# EAGLE board tulip breakout (EAGLE 9.6.2)
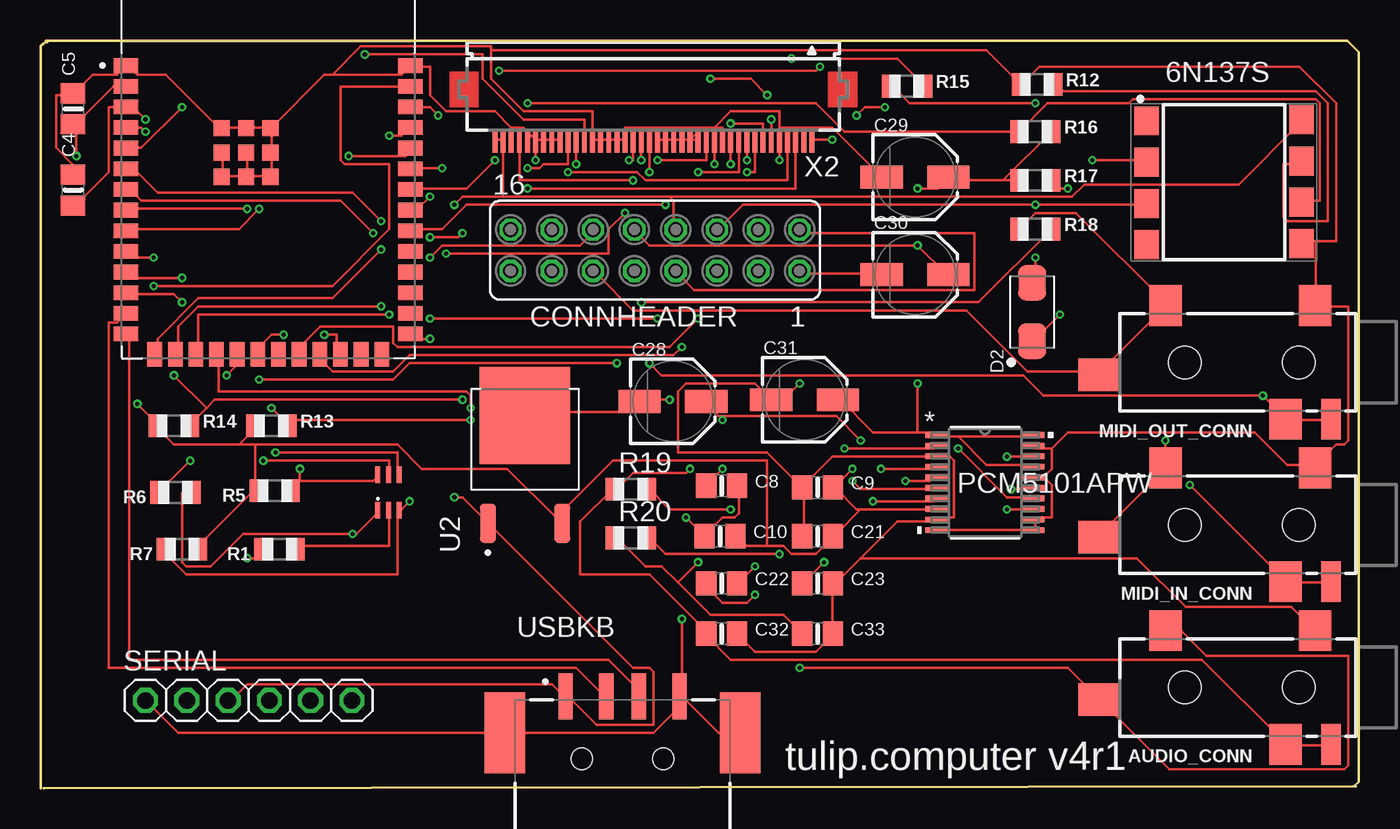
[diagram p0: board, top side]
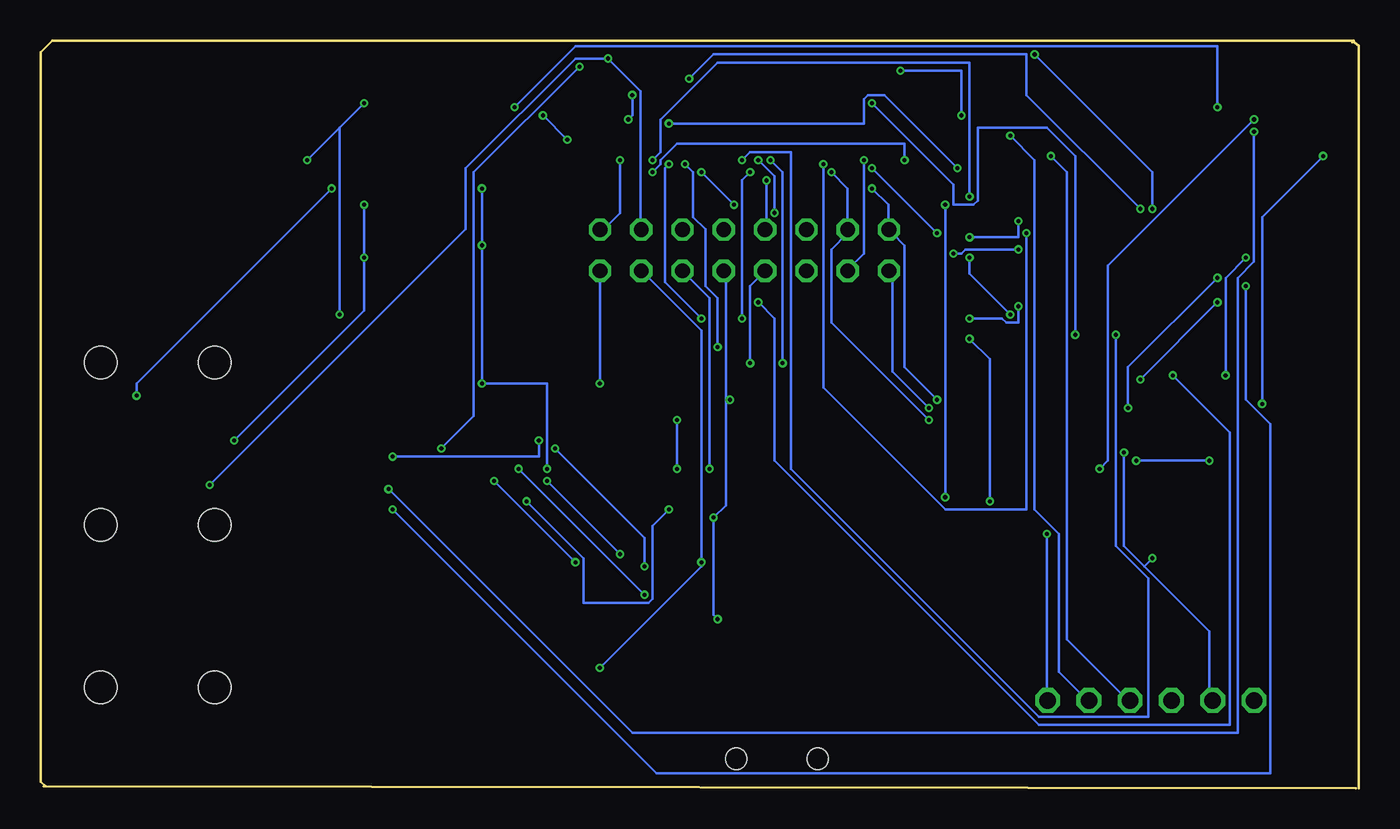
[diagram p1: board, bottom side, seen from below]

Size 81.1 x 46 mm. Coordinates in mm from the lower left corner, seen from the top.
Outline: 0.3,46 80.4,46 81.1,45.3 81.1,0.4 80.8,0.1
Outline: 0,0 0,45.7 0.4,46 0.4,45.9
Outline: 0.2,0 80.9,0.1
Copper layers (1*16): Top 0.035559375mm / dielectric 1.6mm / Bottom 0.035559375mm
Design rules "oshpark-2layer *": minimum track width 6mil, minimum drill 10mil, track to track 6mil, track to pad 6mil, pad to pad 6mil, via to via 6mil, smd to smd 6mil, copper to edge 0mil, drill to drill 6mil, minimum pad ring 5mil, minimum via ring 5mil, stop-mask expansion 2.5mil, vias tented up to drill 0mil, thermal gap 10mil

## Footprints (pad centres in the part's own frame; a part is rotated, then mirrored left to right if it is on the bottom)
8-SMD = smd 1.52 x 1.78: 1 -4.96,3.96; 2 -4.96,1.42; 3 -4.96,-1.12; 4 -4.96,-3.66; 5 4.58,-3.59; 6 4.58,-1.05; 7 4.58,1.49; 8 4.58,4.03
4UCONN_19269 = smd 2 x 2.5: 1 2.5,-3.5; 2 11.7,-3.5; 3 4.3,3.5 | smd 2.5 x 2: 4 15.8,0.75 | smd 1.2 x 2.5: 5 1.5,3.5 | hole 2: 3.5,0; 10.5,0
0805-NO = smd 1.24 x 1.5: 1 -0.95,0; 2 0.95,0
PANASONIC_C = smd 2.6 x 1.4: + 2.05,0; - -2.05,0
FE08-2 = drill 0.914 octagon: 1 -8.89,1.27; 2 -8.89,-1.27; 3 -6.35,1.27; 4 -6.35,-1.27; 5 -3.81,1.27; 6 -3.81,-1.27; 7 -1.27,1.27; 8 -1.27,-1.27; 9 1.27,1.27; 10 1.27,-1.27; 11 3.81,1.27; 12 3.81,-1.27; 13 6.35,1.27; 14 6.35,-1.27; 15 8.89,1.27; 16 8.89,-1.27
DIOM449X264X300L114X135N = smd 2.17 x 1.69: A 1.795,0; C -1.795,0
R0805 = smd 1.1 x 1.4: 1 -1,0; 2 1,0
SOT236 = smd 0.3 x 1: 1 -0.66,-1.09; 2 0,-1.09; 3 0.66,-1.09; 4 0.66,1.09; 5 0,1.09; 6 -0.66,1.09
1X06 = drill 1.016 octagon: 1 -6.35,0; 2 -3.81,0; 3 -1.27,0; 4 1.27,0; 5 3.81,0; 6 6.35,0
XCVR_ESP32-S3-WROOM-2-N32R8V = smd 1.5 x 0.9: 1 -8.75,5.26; 2 -8.75,3.99; 3 -8.75,2.72; 4 -8.75,1.45; 5 -8.75,0.18; 6 -8.75,-1.09; 7 -8.75,-2.36; 8 -8.75,-3.63; 9 -8.75,-4.9; 10 -8.75,-6.17; 11 -8.75,-7.44; 12 -8.75,-8.71; 13 -8.75,-9.98; 14 -8.75,-11.25; 27 8.75,-11.25; 28 8.75,-9.98; 29 8.75,-8.71; 30 8.75,-7.44; 31 8.75,-6.17; 32 8.75,-4.9; 33 8.75,-3.63; 34 8.75,-2.36; 35 8.75,-1.09; 36 8.75,0.18; 37 8.75,1.45; 38 8.75,2.72; 39 8.75,3.99; 40 8.75,5.26 | smd 0.9 x 1.5: 15 -6.985,-12.5; 16 -5.715,-12.5; 17 -4.445,-12.5; 18 -3.175,-12.5; 19 -1.905,-12.5; 20 -0.635,-12.5; 21 0.635,-12.5; 22 1.905,-12.5; 23 3.175,-12.5; 24 4.445,-12.5; 25 5.715,-12.5; 26 6.985,-12.5 | smd 1 x 1: 41_1 -1.36,-0.09; 41_2 -2.86,-0.09; 41_3 0.14,-0.09; 41_4 -2.86,-1.59; 41_5 -1.36,-1.59; 41_6 0.14,-1.59; 41_7 -2.86,1.41; 41_8 -1.36,1.41; 41_9 0.14,1.41
DPAK456P972X240-3N = smd 2.4 x 0.98: 1 -4.2,2.28; 2 -4.2,-2.28 | smd 5.96 x 5.57: 3 2.42,0
PW20_TEX = smd 1.473 x 0.356: 1 -2.921,2.925; 2 -2.921,2.275; 3 -2.921,1.625; 4 -2.921,0.975; 5 -2.921,0.325; 6 -2.921,-0.325; 7 -2.921,-0.975; 8 -2.921,-1.625; 9 -2.921,-2.275; 10 -2.921,-2.925; 11 2.921,-2.925; 12 2.921,-2.275; 13 2.921,-1.625; 14 2.921,-0.975; 15 2.921,-0.325; 16 2.921,0.325; 17 2.921,0.975; 18 2.921,1.625; 19 2.921,2.275; 20 2.921,2.925
SAMTEC_USB-A-S-X-X-SM2 = smd 0.9 x 2.8: 01 -3.5,3.85; 02 -1,3.85; 03 1,3.85; 04 3.5,3.85 | smd 2.5 x 5: S1 -7.25,1.6; S2 7.25,1.6 | hole 1.3: -2.5,0; 2.5,0
FH12-40S-0.5SH = smd 0.3 x 1.3: 1 -9.75,3.25; 2 -9.25,3.25; 3 -8.75,3.25; 4 -8.25,3.25; 5 -7.75,3.25; 6 -7.25,3.25; 7 -6.75,3.25; 8 -6.25,3.25; 9 -5.75,3.25; 10 -5.25,3.25; 11 -4.75,3.25; 12 -4.25,3.25; 13 -3.75,3.25; 14 -3.25,3.25; 15 -2.75,3.25; 16 -2.25,3.25; 17 -1.75,3.25; 18 -1.25,3.25; 19 -0.75,3.25; 20 -0.25,3.25; 21 0.25,3.25; 22 0.75,3.25; 23 1.25,3.25; 24 1.75,3.25; 25 2.25,3.25; 26 2.75,3.25; 27 3.25,3.25; 28 3.75,3.25; 29 4.25,3.25; 30 4.75,3.25; 31 5.25,3.25; 32 5.75,3.25; 33 6.25,3.25; 34 6.75,3.25; 35 7.25,3.25; 36 7.75,3.25; 37 8.25,3.25; 38 8.75,3.25; 39 9.25,3.25; 40 9.75,3.25

## Placement (x,y rotation side)
6N137S  6N137S  [8-SMD]  73,37.1 0 top
AUDIO_CONN  19269  [4UCONN_19269]  80.9,6.2 180 top
C4  4.7uF  [0805-NO]  2,36.8 90 top
C5  4.7uF  [0805-NO]  2,41.8 90 top
C8  0.1uF  [0805-NO]  41.9,18.6 0 top
C9  0.1uF  [0805-NO]  47.8,18.5 0 top
C10  0.1uF  [0805-NO]  41.8,15.5 0 top
C21  0.1uF  [0805-NO]  47.8,15.5 0 top
C22  2.2uF  [0805-NO]  41.9,12.6 0 top
C23  2.2uF  [0805-NO]  47.8,12.6 0 top
C28  10uF  [PANASONIC_C]  38.9,23.8 0 top
C29  10uF  [PANASONIC_C]  53.8,37.6 0 top
C30  10uF  [PANASONIC_C]  53.8,31.6 0 top
C31  10uF  [PANASONIC_C]  47,23.9 0 top
C32  2.2nF  [0805-NO]  41.9,9.5 0 top
C33  2.2nF  [0805-NO]  47.8,9.5 0 top
CONNHEADER  [FE08-2]  37.8,33.1 180 top
D2  EGF1A  [DIOM449X264X300L114X135N]  61,29.3 90 top
MIDI_IN_CONN  19269  [4UCONN_19269]  80.9,16.2 180 top
MIDI_OUT_CONN  19269  [4UCONN_19269]  80.9,26.2 180 top
R1  100k  [R0805]  14.7,14.7 180 top
R5  10k  [R0805]  14.4,18.3 180 top
R6  100k  [R0805]  8.3,18.2 180 top
R7  10k  [R0805]  8.7,14.7 180 top
R12  4.7K  [R0805]  61.3,43.3 0 top
R13  4.7K  [R0805]  14.2,22.3 0 top
R14  4.7K  [R0805]  8.2,22.3 0 top
R15  220  [R0805]  53.3,43.2 0 top
R16  470  [R0805]  61.2,40.4 0 top
R17  33  [R0805]  61.2,37.4 0 top
R18  10  [R0805]  61.2,34.4 0 top
R19  470  [R0805]  36.3,18.4 0 top
R20  470  [R0805]  36.3,15.4 0 top
RESET  MBT3904DW1T1G  [SOT236]  21.4,18.2 0 top
SERIAL  [1X06]  12.8,5.4 0 top
U1  ESP32-S3-WROOM-2-N32R8V  [XCVR_ESP32-S3-WROOM-2-N32R8V]  14,39.2 0 top
U2  LD29150DT33R  [DPAK456P972X240-3N]  29.8,20.5 90 top
U3  PCM5101APW  [PW20_TEX]  58.1,18.8 0 top
USBKB  USB-A-S-X-X-SM2  [SAMTEC_USB-A-S-X-X-SM2]  35.8,1.8 0 top
X2  FH12-40S-0.5SH  [FH12-40S-0.5SH]  37.7,43 180 top

## Library data of the parts
6N137S = 6N137S; AVAILABILITY: In Stock; DESCRIPTION: Logic Output Optoisolator 15MBd Open Collector 5000Vrms 1 Channel 10kV/µs CMTI 8-SMD; MF: Lite-On Inc.; MP: 6N137S; PACKAGE: SMD-8 Lite-On Inc.; PRICE: None; PURCHASE-URL: https://pricing.snapeda.com/search/part/6N137S/?ref=eda
AUDIO_CONN C4 C5 C8-C10 C21-C23 C28-C33 MIDI_IN_CONN MIDI_OUT_CONN = microbuilder
CONNHEADER = con-lsta; OC_FARNELL: unknown; OC_NEWARK: unknown
D2 = EGF1A; AVAILABILITY: In Stock; DESCRIPTION: Diode Standard 50 V 1A Surface Mount DO-214AC (SMA); MF: ON Semiconductor; MP: EGF1A; PACKAGE: SMA-2 ON Semiconductor; PRICE: None; PURCHASE-URL: https://pricing.snapeda.com/search/part/EGF1A/?ref=eda
R1 R5-R7 R12-R20 SERIAL = adafruit
RESET = MBT3904DW1T1G; AVAILABILITY: In Stock; DESCRIPTION: Bipolar (BJT) Transistor Array 2 NPN (Dual) 40V 200mA 300MHz 150mW Surface Mount SC-88/SC70-6/SOT-363; MF: ON Semiconductor; MP: MBT3904DW1T1G; PACKAGE: SC-88-6 ON Semiconductor; PRICE: None; PURCHASE-URL: https://pricing.snapeda.com/search/part/MBT3904DW1T1G/?ref=eda
U1 = ESP32-S3-WROOM-2-N32R8V; AVAILABILITY: In Stock; DESCRIPTION: Bluetooth, WiFi 802.11b/g/n, Bluetooth v5.0 Transceiver Module 2.4GHz PCB Trace Surface Mount; MF: Espressif Systems; MP: ESP32-S3-WROOM-2-N32R8V; PACKAGE: Package; PRICE: None; PURCHASE-URL: https://pricing.snapeda.com/search/part/ESP32-S3-WROOM-2-N32R8V/?ref=eda
U2 = LD29150DT33R; DESCRIPTION: Linear Voltage Regulator IC Positive Fixed 1 Output 1.5A DPAK; DIGI-KEY_PART_NUMBER: 497-1496-2-ND; MF: STMicroelectronics; MP: LD29150DT33R; PACKAGE: TO-252 STMicroelectronics; PURCHASE-URL: https://pricing.snapeda.com/search/part/LD29150DT33R/?ref=eda
U3 = pcm5101apw; COPYRIGHT: Copyright (C) 2022 Ultra Librarian. All rights reserved.; DIGI-KEY_PART_NUMBER_1: PCM5101APW-ND; MANUFACTURER_PART_NUMBER: PCM5101APW; MFR_NAME: Texas Instruments
USBKB = USB-A-S-X-X-SM2; AVAILABILITY: In Stock; DESCRIPTION: USB-A (USB TYPE-A) USB 2.0 Receptacle Connector 4 Position Surface Mount, Right Angle; MF: Samtec; MP: USB-A-S-F-W-SM2-TR; PACKAGE: None; PRICE: None; PURCHASE-URL: https://pricing.snapeda.com/search/part/USB-A-S-F-W-SM2-TR/?ref=eda
X2 = con-hirose; MPN: FH12-40S-0.5SH(55); OC_FARNELL: 1324556; OC_NEWARK: 34M6178

## Nets
3V3: C5.1 C9.2 C10.2 C21.2 C29.+ C30.+ C31.+ CONNHEADER.10 R5.2 R7.1 R13.1 R14.1 R16.2 R17.1 U1.2 U2.2 U3.1 U3.8 U3.17 U3.20 X2.37
5V_USB: 6N137S.8 CONNHEADER.8 SERIAL.3 U2.1 USBKB.01 X2.39 X2.40
!DTR: R1.2 RESET.4 SERIAL.2
!RTS: R6.1 RESET.1 SERIAL.6
AGND: AUDIO_CONN.1 C9.1 C21.1 C23.2 C30.- C31.- C32.2 C33.2 CONNHEADER.1 U3.3 U3.9
B6: U1.20 X2.14
B7: U1.23 X2.13
BCLK: U1.39 U3.13
BLEN: U1.32 X2.10
D+: U1.14 USBKB.03
D-: U1.13 USBKB.02
DE: U1.35 X2.7
DIN: U1.38 U3.14
ESP32_EN: C4.1 R5.1 RESET.6 U1.3
G5: U1.12 X2.23
G6: U1.15 X2.22
G7: U1.16 X2.21
GND: 6N137S.5 C4.2 C5.2 C8.2 C10.1 C28.- C29.- CONNHEADER.2 CONNHEADER.7 CONNHEADER.13 MIDI_IN_CONN.1 MIDI_OUT_CONN.1 R12.1 SERIAL.1 U1.1 U1.40 U1.41_1 U1.41_2 U1.41_3 U1.41_4 U1.41_5 U1.41_6 U1.41_7 U1.41_8 U1.41_9 U2.3 U3.10 U3.11 U3.12 U3.16 U3.19 USBKB.04 USBKB.S1 USBKB.S2 X2.5 X2.12 X2.15 X2.16 X2.17 X2.18 X2.19 X2.20 X2.24 X2.25 X2.26 X2.27 X2.28 X2.32 X2.33 X2.34 X2.35 X2.36 X2.38
GPIO10: CONNHEADER.15 U1.18
HSYNC: U1.33 X2.9
INT: U1.5 X2.1
IO0: R7.2 RESET.3 U1.27
LOUT: AUDIO_CONN.2 AUDIO_CONN.4 C33.1 CONNHEADER.3 R20.1
LRC: U1.4 U3.15
MIDI_IN: 6N137S.6 R16.1 U1.24
MIDI_IN_SINK: 6N137S.3 CONNHEADER.6 D2.A MIDI_IN_CONN.2 MIDI_IN_CONN.4
MIDI_IN_SOURCE: CONNHEADER.4 MIDI_IN_CONN.3 MIDI_IN_CONN.5 R15.2
MIDI_OUT: R18.2 U1.19
MIDI_OUT_SINK: CONNHEADER.11 MIDI_OUT_CONN.2 MIDI_OUT_CONN.4 R18.1
MIDI_OUT_SOURCE: CONNHEADER.9 MIDI_OUT_CONN.3 MIDI_OUT_CONN.5 R17.2
N$1: R1.1 RESET.2
N$2: R6.2 RESET.5
N$7: C8.1 C28.+ U3.18
N$8: R19.2 U3.7
N$16: C22.1 U3.4
N$18: C22.2 U3.2
N$30: 6N137S.2 D2.C R15.1
N$32: 6N137S.7 R12.2
OUTL: R20.2 U3.6
PCLK: U1.22 X2.11
PWM: U1.9 X2.6
PWR: CONNHEADER.12 U1.17
R5: U1.6 X2.31
R6: U1.7 X2.30
R7: U1.8 X2.29
ROUT: AUDIO_CONN.3 AUDIO_CONN.5 C32.1 CONNHEADER.5 R19.1
SCL: CONNHEADER.16 R14.2 U1.10 X2.3
SDA: CONNHEADER.14 R13.2 U1.11 X2.4
UART0_RXD: SERIAL.4 U1.36
UART0_TXD: SERIAL.5 U1.37
VNEG: C23.1 U3.5
VSYNC: U1.34 X2.8

## Tracks (layer width: path | path; a pad name or v marks a point on that pad's centre or on a via)
3V3  (via drill 0.25)
  Top 0.152: 56.45,21.65 58.2,19.9 60.95,19.9 U3.17 | 56.45,21.65 55.2,21.65 U3.1 54.95,21.9 53.95,21.9 | 56.45,21.65 60.95,21.65 U3.20 | 53.95,21.9 51.2,21.9 49.2,23.9 C31.+ | 59.2,37.4 55.95,37.4 C29.+ 55.7,37.4 55.2,36.9 v53.95,36.9 | 59.2,37.4 R17.1 | 59.2,37.4 R16.2 | X2.37 29.45,37.4 v36.45,37.4 | C30.+ 55.7,31.65 v53.95,33.4 37.45,33.4 36.7,34.15 CONNHEADER.10 | v53.95,24.9 53.95,21.9 | 44.7,14.9 45.7,14.9 46.2,14.4 47.7,14.4 48.7,15.4 C21.2 48.95,15.65 50.45,17.15 | 44.7,14.9 43.45,14.9 42.95,15.4 C10.2 | 50.45,17.15 50.2,17.15 48.95,18.4 C9.2 48.95,18.65 v49.95,19.65 | 50.45,17.15 54.95,17.15 U3.8 | R7.1 9.7,14.9 12.95,18.15 13.2,18.15 R5.2 13.2,18.4 13.2,21.15 | U1.2 5.2,43.15 4.45,43.15 2.2,40.9 C5.1 2.2,40.65 v2.2,38.9 | 12.2,21.15 8.2,21.15 7.2,22.15 R14.1 7.2,22.4 v5.95,23.65 | 12.2,21.15 13.2,22.15 R13.1 | 31.7,16.65 28.7,19.65 23.45,19.65 21.95,21.15 13.2,21.15 | 31.7,16.65 31.95,16.4 U2.2 31.7,16.65 | 12.2,21.15 13.2,21.15 | 44.7,14.9 44.7,20.15 35.2,20.15 31.7,16.65
  Bottom 0.152: v36.45,37.4 36.45,34.4 CONNHEADER.10 | v53.95,36.9 v53.95,33.4 v53.95,24.9 49.95,24.9 v49.95,19.65 | v2.2,38.9 5.95,35.15 v5.95,23.65
5V_USB  (via drill 0.25)
  Top 0.152: SERIAL.3 11.7,5.4 12.7,6.4 31.45,6.4 32.2,5.65 USBKB.01 32.45,5.65 34.2,3.9 37.7,3.9 37.7,7.15 37.45,7.4 36.45,7.4 27.7,16.15 U2.1 27.45,16.4 25.95,17.9 v25.45,17.9 | X2.40 27.95,39.9 28.45,39.9 X2.39 28.45,36.4 | 38.7,36.4 28.45,36.4 | 38.7,36.4 38.95,36.15 38.95,34.4 CONNHEADER.8 | 38.7,36.4 63.45,36.4 64.2,37.15 73.7,37.15 77.45,40.9 6N137S.8 | v25.45,35.9 25.95,36.4 28.45,36.4
  Bottom 0.152: v25.45,35.9 v25.45,17.9
!DTR  (via drill 0.25)
  Top 0.152: v14.45,20.65 21.95,20.65 21.95,19.4 RESET.4 | v12.7,14.15 13.2,14.15 13.7,14.65 R1.2
  Bottom 0.152: v14.45,20.65 14.45,14.9 13.2,13.65 | 13.2,13.65 9.2,9.65 9.2,5.4 SERIAL.2 | 13.2,13.65 v12.7,14.15
!RTS  (via drill 0.25)
  Top 0.152: RESET.1 20.7,16.9 19.45,15.65 v19.2,15.65 12.45,15.65 10.45,13.65 8.95,13.65 8.7,13.9 8.7,18.15 9.2,18.15 R6.1
  Bottom 0.152: v19.2,15.65 19.2,5.4 SERIAL.6
AGND  (via drill 0.25)
  Top 0.152: C30.- 51.7,31.65 46.7,31.65 CONNHEADER.1 | C32.2 43.95,8.4 47.7,8.4 48.7,9.4 C33.2 48.7,9.65 48.7,12.4 C23.2 48.95,12.65 50.45,14.15 | C21.1 46.95,15.65 46.95,18.4 C9.1 | 50.45,14.15 52.7,16.4 54.95,16.4 U3.9 55.2,16.65 56.2,16.65 56.2,20.15 55.95,20.4 55.2,20.4 U3.3 54.95,20.4 48.7,20.4 46.95,18.65 C9.1 | AUDIO_CONN.1 76.95,11.15 70.45,11.15 67.45,14.15 50.45,14.15 | C9.1 44.7,20.65 39.2,20.65 39.2,24.4 39.7,24.9 43.95,24.9 C31.- 45.7,23.9 v46.7,24.9
  Bottom 0.152: v46.7,24.9 46.7,31.65 CONNHEADER.1
B6  (via drill 0.25)
  Top 0.152: X2.14 40.95,38.65 v37.95,38.65 | v14.95,27.9 14.2,27.9 13.2,26.9 U1.20
  Bottom 0.152: v37.95,38.65 37.45,39.15 34.95,39.15 34.95,19.65 19.7,4.4 12.95,4.4 12.95,12.9 14.95,14.9 v14.95,27.9
B7  (via drill 0.25)
  Top 0.152: v41.45,38.4 X2.13 | v39.45,27.15 38.95,26.65 22.7,26.65 21.7,25.65 17.95,25.65 16.95,26.65 U1.23
  Bottom 0.152: v41.45,38.4 40.95,37.9 40.95,35.15 40.2,34.4 40.2,30.9 39.45,30.15 v39.45,27.15
BCLK  (via drill 0.25)
  Top 0.152: v59.45,17.15 60.95,17.15 U3.13 | v6.95,30.9 17.95,30.9 21.45,34.4 21.45,38.4 18.7,38.4 18.45,38.65 18.45,43.15 22.7,43.15 U1.39
  Bottom 0.152: v59.45,17.15 43.2,0.9 5.45,0.9 5.45,22.4 6.95,23.9 v6.95,30.9
BLEN  (via drill 0.25)
  Top 0.152: X2.10 42.95,37.9 v40.45,37.9 | v38.45,35.9 26.2,35.9 24.7,34.4 22.95,34.4 U1.32
  Bottom 0.152: v38.45,35.9 v40.45,37.9
D+
  Top 0.152: U1.14 5.45,27.9 5.45,7.9 34.95,7.9 36.7,6.15 36.7,5.65 USBKB.03
D-
  Top 0.152: U1.13 5.2,29.15 4.7,28.65 4.2,28.65 4.2,7.4 32.95,7.4 34.7,5.65 USBKB.02
DE  (via drill 0.25)
  Top 0.152: X2.7 44.45,40.9 v42.45,40.9 | v24.7,38.15 22.95,38.15 U1.35
  Bottom 0.152: v42.45,40.9 30.45,40.9 30.45,42.4 30.2,42.65 29.2,42.65 v24.7,38.15
DIN  (via drill 0.25)
  Top 0.152: v56.45,20.9 59.45,17.9 60.95,17.9 U3.14 | v47.95,44.4 47.7,44.15 v28.2,44.15 | v24.45,41.4 23.95,41.9 22.95,41.9 U1.38
  Bottom 0.152: v56.45,20.9 54.45,22.9 54.45,37.9 v47.95,44.4 | v28.2,44.15 24.45,44.15 v24.45,41.4
ESP32_EN  (via drill 0.25)
  Top 0.152: 15.95,18.9 20.45,18.9 20.7,19.15 RESET.6 | 15.95,18.9 15.45,18.4 R5.1 | C4.1 2.2,35.9 4.2,37.9 4.2,41.9 5.2,41.9 U1.3 5.45,41.9 5.7,41.9 v6.45,41.15 | v15.95,19.65 15.95,18.9
  Bottom 0.152: v15.95,19.65 15.45,20.15 15.45,32.15 v6.45,41.15
G5  (via drill 0.25)
  Top 0.152: X2.23 36.45,38.65 v36.2,38.65 | v35.45,26.15 22.7,26.15 21.7,25.15 v13.45,25.15 | v8.7,29.9 8.2,30.4 5.45,30.4 U1.12
  Bottom 0.152: v36.2,38.65 35.45,37.9 v35.45,26.15 | v8.7,29.9 v13.45,25.15
G6  (via drill 0.25)
  Top 0.152: v36.95,38.65 X2.22 | v35.95,35.4 34.95,34.4 34.95,32.9 v24.95,32.9 | v20.95,33.15 17.95,30.15 9.7,30.15 7.2,27.65 7.2,26.9 U1.15
  Bottom 0.152: v36.95,38.65 35.95,37.65 v35.95,35.4 | v24.95,32.9 24.45,32.9 24.2,33.15 v20.95,33.15
G7  (via drill 0.25)
  Top 0.152: v37.45,37.9 X2.21 | v23.95,28.9 v37.95,28.9 | v20.95,29.65 9.7,29.65 8.45,28.4 8.45,26.9 U1.16
  Bottom 0.152: v37.45,37.9 37.95,37.4 v37.95,28.9 | v23.95,28.9 21.95,28.9 21.7,28.65 20.95,28.65 v20.95,29.65
GND  (via drill 0.25)
  Top 0.152: 39.7,5.4 41.7,3.4 USBKB.S2 | 39.7,5.4 39.45,5.65 | SERIAL.1 8.45,3.4 USBKB.S1 37.7,3.4 39.7,5.4 | 39.7,5.4 USBKB.04 39.45,5.65 | U2.3 29.95,23.15 36.2,23.15 C28.- 36.95,23.9 v38.7,23.9 | C8.2 42.95,18.4 42.95,16.9 42.7,16.65 41.95,16.65 40.95,15.65 C10.1 v39.7,16.65 | CONNHEADER.7 39.2,31.65 40.2,30.65 57.45,30.65 57.45,34.15 46.7,34.15 CONNHEADER.2 | v39.45,10.4 39.45,5.65 | 78.45,33.65 77.7,33.65 6N137S.5 | 78.45,33.65 79.7,33.65 79.7,42.15 77.45,44.4 61.45,44.4 60.45,43.4 R12.1 58.2,45.4 27.7,45.4 | 61.7,19.15 61.2,19.15 U3.16 61.7,19.15 | 61.7,19.15 62.2,19.65 62.2,20.9 | 62.2,20.9 61.2,20.9 U3.19 | U3.10 55.2,15.9 60.95,15.9 U3.11 61.2,15.9 61.2,16.4 U3.12 61.2,16.65 62.2,16.65 62.2,18.65 61.7,19.15 | 62.2,20.9 63.2,21.9 74.7,21.9 76.7,19.9 78.2,19.9 MIDI_IN_CONN.1 78.45,19.9 79.7,21.15 80.2,21.15 80.45,21.4 80.45,29.65 78.45,29.65 MIDI_OUT_CONN.1 78.45,29.9 78.45,33.65 | 34.45,39.9 33.95,39.9 | 34.45,39.9 34.95,39.9 | 34.45,39.9 X2.27 | 34.95,39.9 35.45,39.9 | 34.95,39.9 X2.26 | 35.45,39.9 35.95,39.9 | 35.45,39.9 X2.25 | 38.45,39.9 37.95,39.9 X2.20 | 38.45,39.9 38.95,39.9 | 38.45,39.9 X2.19 | 38.95,39.9 39.45,39.9 | 38.95,39.9 X2.18 | 39.45,39.9 39.95,39.9 | 39.45,39.9 X2.17 | 39.95,39.9 40.45,39.9 X2.15 | X2.12 41.95,40.65 41.45,40.65 | 40.7,40.65 41.45,40.65 | 39.95,39.9 40.7,40.65 | 39.95,39.9 X2.16 | 45.45,40.65 45.45,41.65 42.45,41.65 41.45,40.65 | 45.45,40.65 X2.5 v45.45,38.65 | 35.95,39.9 35.95,40.65 40.7,40.65 | 35.95,39.9 X2.24 | C29.- 48.7,40.65 45.45,40.65 | C4.2 1.95,37.9 1.95,38.4 0.95,39.4 0.95,42.65 1.95,42.65 C5.2 2.2,42.9 3.2,43.9 4.7,43.9 5.2,44.4 U1.1 5.45,44.4 5.95,43.9 7.7,43.9 10.95,40.65 U1.41_7 11.2,40.65 12.45,40.65 U1.41_8 12.7,40.65 13.95,40.65 U1.41_9
  Top 0.152: 11.2,37.65 11.2,38.9 U1.41_2 | 12.7,37.65 12.7,38.9 U1.41_1 | 11.2,37.65 12.45,37.65 U1.41_5 12.7,37.65 | 11.2,37.65 U1.41_4 | 12.7,37.65 13.95,37.65 U1.41_6 14.2,37.65 14.2,38.9 U1.41_3 14.2,39.15 14.2,40.4 U1.41_9 | 28.95,40.65 X2.38 | 28.95,40.65 29.7,40.65 30.2,40.15 | 30.45,39.9 30.2,40.15 | 30.2,40.15 29.95,39.9 X2.36 | 30.45,39.9 30.95,39.9 | 30.45,39.9 X2.35 v30.45,38.65 | 30.95,39.9 31.45,39.9 | 30.95,39.9 X2.34 | 31.45,39.9 31.95,39.9 X2.32 | 31.45,39.9 X2.33 | 17.95,43.9 17.45,43.9 14.2,40.65 U1.41_9 | 17.95,43.9 22.2,43.9 22.7,44.4 U1.40 22.95,44.4 23.95,44.4 23.95,42.65 24.95,41.65 27.95,41.65 28.95,40.65 | 33.95,39.9 33.95,41.65 29.7,41.65 27.7,43.65 27.7,45.4 | 27.7,45.4 27.7,45.65 19.7,45.65 17.95,43.9 | 33.95,39.9 X2.28
  Bottom 0.152: 38.95,23.9 38.95,31.65 CONNHEADER.7 | 38.95,23.9 38.95,17.4 v39.7,16.65 39.7,10.65 v39.45,10.4 | 38.95,23.9 v38.7,23.9 | v30.45,38.65 30.45,32.9 31.45,31.9 CONNHEADER.13 | v45.45,38.65 45.45,35.4 46.45,34.4 CONNHEADER.2
GPIO10  (via drill 0.25)
  Top 0.152: v26.45,23.4 26.45,24.15 26.2,24.4 10.95,24.4 10.95,26.65 U1.18
  Bottom 0.152: v26.45,23.4 28.7,25.65 28.7,31.65 CONNHEADER.15
HSYNC  (via drill 0.25)
  Top 0.152: v43.45,38.65 X2.9 | v23.95,36.4 23.2,35.65 22.95,35.65 U1.33
  Bottom 0.152: v43.45,38.65 42.95,39.15 42.95,41.15 39.45,44.65 23.95,44.65 v23.95,36.4
INT  (via drill 0.25)
  Top 0.152: v48.7,39.9 47.45,39.9 X2.1 | v50.2,41.4 50.7,41.9 v51.95,41.9 | v8.7,41.9 6.2,39.4 5.45,39.4 U1.5
  Bottom 0.152: v50.2,41.4 v48.7,39.9 | v51.95,41.9 48.2,45.65 8.7,45.65 v8.7,41.9
IO0  (via drill 0.25)
  Top 0.152: R7.2 7.7,14.4 8.95,13.15 21.95,13.15 21.95,16.9 RESET.3 22.2,17.15 v22.7,17.65 | v23.95,27.65 23.2,27.65 22.95,27.9 U1.27
  Bottom 0.152: v23.95,27.65 22.7,26.4 v22.7,17.65
LOUT  (via drill 0.25)
  Top 0.152: AUDIO_CONN.2 69.2,9.65 70.2,9.65 71.7,8.15 80.45,8.15 80.45,1.4 80.2,1.15 69.45,1.15 65.2,5.4 AUDIO_CONN.4 64.95,5.65 63.2,7.4 v46.7,7.4 | 39.2,12.65 41.2,10.65 45.7,10.65 C33.1 | 39.2,12.65 38.2,13.65 37.2,13.65 35.45,15.4 R20.1 | 39.2,12.65 v40.45,13.9
  Bottom 0.152: CONNHEADER.3 43.95,31.65 40.45,28.15 v40.45,13.9 40.45,13.65 v46.7,7.4
LRC  (via drill 0.25)
  Top 0.152: v59.7,18.4 60.95,18.4 U3.15 | v6.45,40.4 6.2,40.65 U1.4
  Bottom 0.152: v59.7,18.4 44.7,3.4 7.45,3.4 7.45,31.4 6.45,32.4 v6.45,40.4
MIDI_IN  (via drill 0.25)
  Top 0.152: 6N137S.6 77.7,36.15 78.7,36.15 78.7,42.15 78.45,42.4 67.2,42.4 66.95,42.15 61.95,42.15 R16.1 49.45,40.4 47.7,42.15 v29.95,42.15 | v17.45,27.9 18.2,27.9 18.2,26.9 U1.24
  Bottom 0.152: v17.45,27.9 17.45,38.9 19.2,40.65 23.45,40.65 23.45,36.15 23.7,35.9 24.95,35.9 24.95,37.15 v29.95,42.15
MIDI_IN_SINK  (via drill 0.25)
  Top 0.152: MIDI_IN_CONN.4 65.2,15.65 69.2,19.65 MIDI_IN_CONN.2 v69.2,21.4 | 6N137S.3 67.95,35.9 v61.2,35.9 43.2,35.9 41.7,34.4 CONNHEADER.6 | v61.2,32.65 61.2,31.15 D2.A
  Bottom 0.152: v61.2,35.9 v61.2,32.65 61.2,29.4 v69.2,21.4
MIDI_IN_SOURCE  (via drill 0.25)
  Top 0.152: MIDI_IN_CONN.5 79.2,12.65 76.7,12.65 MIDI_IN_CONN.3 76.45,12.9 v70.7,18.65 | v46.2,44.9 52.7,44.9 54.2,43.4 R15.2
  Bottom 0.152: CONNHEADER.4 44.2,34.4 44.2,42.9 v46.2,44.9 48.2,44.9 54.95,38.15 54.95,34.4 v70.7,18.65
MIDI_OUT  (via drill 0.25)
  Top 0.152: R18.2 57.7,29.9 v36.95,29.9 | v11.45,25.4 11.95,25.9 11.95,26.65 U1.19
  Bottom 0.152: v36.95,29.9 35.95,28.9 35.95,20.15 19.7,3.9 7.95,3.9 7.95,21.9 v11.45,25.4
MIDI_OUT_SINK
  Top 0.152: R18.1 61.2,35.4 63.7,35.4 69.2,29.9 MIDI_OUT_CONN.2 69.2,29.65 65.2,25.65 MIDI_OUT_CONN.4 64.95,25.65 60.7,25.65 56.95,29.4 36.45,29.4 34.2,31.65 CONNHEADER.11
MIDI_OUT_SOURCE  (via drill 0.25)
  Top 0.152: R17.2 62.7,36.9 v63.2,36.9 | MIDI_OUT_CONN.5 79.2,22.65 76.7,22.65 MIDI_OUT_CONN.3 76.45,22.9 v75.2,24.15 61.7,24.15 60.45,25.4 38.2,25.4 v37.45,26.15
  Bottom 0.152: v63.2,36.9 75.2,24.9 v75.2,24.15 | v37.45,26.15 37.45,30.9 36.7,31.65 CONNHEADER.9
N$1
  Top 0.152: RESET.2 21.45,16.9 21.45,14.9 15.7,14.9 R1.1
N$2  (via drill 0.25)
  Top 0.152: v13.7,20.15 21.45,20.15 21.45,19.4 RESET.5 | v9.2,20.15 7.45,18.4 R6.2
  Bottom 0.152: v9.2,20.15 v13.7,20.15
N$7  (via drill 0.25)
  Top 0.152: v59.45,20.4 60.95,20.4 U3.18 | v50.45,21.4 48.95,22.9 41.95,22.9 | 41.95,22.9 41.7,22.9 40.95,23.65 C28.+ | v41.95,19.65 40.95,18.65 C8.1 | 41.95,22.9 v41.95,22.65
  Bottom 0.152: v59.45,20.4 50.45,20.4 v50.45,21.4 | v41.95,22.65 v41.95,19.65
N$8  (via drill 0.25)
  Top 0.152: v42.45,17.15 38.7,17.15 37.45,18.4 R19.2 | v51.2,17.65 54.95,17.65 U3.7
  Bottom 0.152: v42.45,17.15 43.45,16.15 43.45,11.65 43.7,11.4 47.7,11.4 47.7,14.15 v51.2,17.65
N$16  (via drill 0.25)
  Top 0.152: v51.7,19.65 54.95,19.65 U3.4 | v43.95,11.9 43.45,11.4 41.95,11.4 40.95,12.4 C22.1
  Bottom 0.152: v43.95,11.9 v51.7,19.65
N$18  (via drill 0.25)
  Top 0.152: v49.45,20.9 54.95,20.9 U3.2 | v43.95,13.65 42.95,12.65 C22.2
  Bottom 0.152: v49.45,20.9 43.95,15.4 v43.95,13.65
N$30  (via drill 0.25)
  Top 0.152: v61.2,42.15 53.45,42.15 52.45,43.15 R15.1 | v64.7,38.65 67.95,38.65 6N137S.2 | v62.7,29.15 61.2,27.65 D2.C
  Bottom 0.152: v64.7,38.65 62.7,40.65 | 62.7,40.65 v61.2,42.15 | 62.7,40.65 v62.7,29.15
N$32
  Top 0.152: R12.2 62.7,42.9 78.45,42.9 79.2,42.15 79.2,34.9 76.7,34.9 76.45,35.15 76.45,38.4 77.45,38.4 6N137S.7
OUTL  (via drill 0.25)
  Top 0.152: v45.45,14.4 38.45,14.4 37.45,15.4 R20.2 | v49.95,18.9 50.45,18.4 54.95,18.4 U3.6
  Bottom 0.152: v49.95,18.9 v45.45,14.4
PCLK  (via drill 0.25)
  Top 0.152: v42.45,38.4 X2.11 | v40.45,28.9 38.7,27.15 21.95,27.15 21.7,27.4 21.7,28.4 17.2,28.4 15.7,26.9 U1.22
  Bottom 0.152: v42.45,38.4 42.7,38.15 42.7,31.15 v40.45,28.9
PWM  (via drill 0.25)
  Top 0.152: v44.95,41.15 X2.6 | v44.7,42.65 43.7,43.65 v41.2,43.65 | v13.45,35.65 12.2,34.4 5.45,34.4 U1.9
  Bottom 0.152: v44.95,41.15 44.7,41.4 v44.7,42.65 | v41.2,43.65 39.7,45.15 20.45,45.15 20.45,42.65 v13.45,35.65
PWR  (via drill 0.25)
  Top 0.152: v21.45,29.15 9.7,29.15 9.7,26.9 U1.17 | v23.95,32.65 24.7,33.4 33.2,33.4 33.95,34.15 CONNHEADER.12
  Bottom 0.152: v21.45,29.15 23.95,31.65 v23.95,32.65
R5  (via drill 0.25)
  Top 0.152: X2.31 32.45,38.4 30.95,38.4 30.7,38.15 v29.95,38.15 | v25.95,34.15 25.7,33.9 v23.95,33.9 | v20.95,34.9 19.2,36.65 7.2,36.65 5.95,37.9 5.45,37.9 U1.6
  Bottom 0.152: v25.95,34.15 v29.95,38.15 | v23.95,33.9 20.95,33.9 v20.95,34.9
R6  (via drill 0.25)
  Top 0.152: v32.95,38.4 X2.30 | v20.45,34.15 18.45,36.15 6.2,36.15 5.7,36.65 5.45,36.65 U1.7
  Bottom 0.152: v32.95,38.4 32.95,24.65 25.45,17.15 20.45,17.15 v20.45,34.15
R7  (via drill 0.25)
  Top 0.152: X2.29 33.45,41.15 29.7,41.15 27.2,43.65 27.2,45.15 v19.95,45.15 | v12.7,35.65 5.45,35.65 U1.8
  Bottom 0.152: v19.95,45.15 12.7,37.9 v12.7,35.65
ROUT  (via drill 0.25)
  Top 0.152: AUDIO_CONN.5 79.2,2.65 76.7,2.65 AUDIO_CONN.3 76.45,2.9 71.45,7.9 42.45,7.9 40.95,9.4 C32.1 40.95,9.65 37.45,13.15 33.2,13.15 33.2,16.4 35.2,18.4 R19.1 35.45,18.4 36.45,19.4 39.7,19.4 v39.95,19.65
  Bottom 0.152: v39.95,19.65 39.95,30.15 41.45,31.65 CONNHEADER.5
SCL  (via drill 0.25)
  Top 0.152: X2.3 46.45,36.9 v29.95,36.9 | 10.2,23.4 10.7,23.9 v25.95,23.9 | 10.2,23.4 9.2,22.4 R14.2 | v6.95,32.65 5.7,32.65 5.45,32.9 U1.10 | 10.2,23.4 v8.2,25.4
  Bottom 0.152: v29.95,36.9 28.95,35.9 28.95,34.4 CONNHEADER.16 28.7,34.15 27.95,33.4 27.95,25.9 v25.95,23.9 | v6.95,32.65 8.2,31.4 v8.2,25.4
SDA  (via drill 0.25)
  Top 0.152: X2.4 45.95,37.4 37.2,37.4 36.7,37.9 v32.45,37.9 | 15.2,22.4 15.45,22.65 v26.45,22.65 | v8.7,31.4 5.7,31.4 5.45,31.65 U1.11 | 15.2,22.4 v14.2,23.4 | 15.2,22.4 R13.2
  Bottom 0.152: v32.45,37.9 31.45,36.9 CONNHEADER.14 31.45,34.15 32.45,33.15 32.45,28.65 v26.45,22.65 | v8.7,31.4 14.2,25.9 v14.2,23.4
UART0_RXD  (via drill 0.25)
  Top 0.152: v18.95,38.9 22.45,38.9 22.7,39.15 U1.36
  Bottom 0.152: v18.95,38.9 17.95,37.9 17.95,9.15 14.2,5.4 SERIAL.4
UART0_TXD  (via drill 0.25)
  Top 0.152: v21.45,40.15 22.2,40.15 22.7,40.65 U1.37
  Bottom 0.152: v21.45,40.15 19.95,38.65 19.95,17.15 18.45,15.65 18.45,7.15 16.7,5.4 SERIAL.5
VNEG  (via drill 0.25)
  Top 0.152: v53.2,18.9 54.7,18.9 54.95,19.15 U3.5 | v48.2,13.9 46.95,12.65 C23.1
  Bottom 0.152: v48.2,13.9 v53.2,18.9
VSYNC  (via drill 0.25)
  Top 0.152: X2.8 43.95,37.9 v43.45,37.9 | v27.95,38.65 26.2,36.9 22.95,36.9 U1.34
  Bottom 0.152: v43.45,37.9 42.95,38.4 42.95,38.65 41.95,39.65 27.95,39.65 v27.95,38.65

## Text on the board
tPlace: tulip.computer v4r1